# Altium PCB MyFirstPCB.PcbDoc
Units mil, origin at the board's own origin, x right, y up, seen from the top; angles counter-clockwise.
Board outline 6000 x 4000 mil, 2 copper layers (Top Layer, Bottom Layer); 4 components, 3 nets, 8 pads, 0 vias.
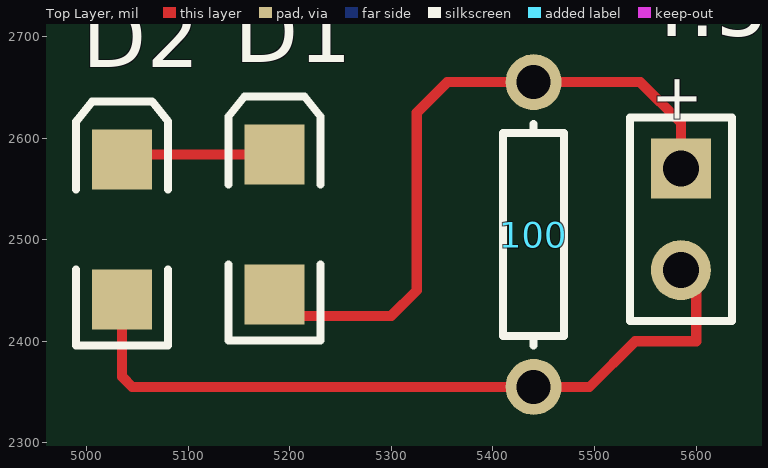
[diagram p0: Top Layer view]
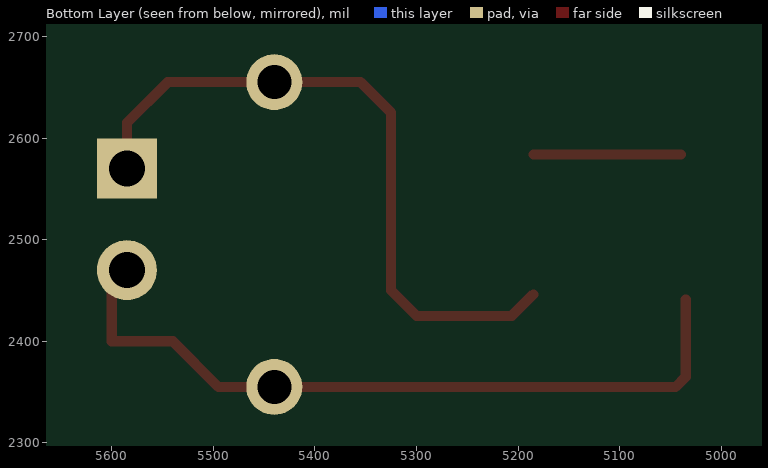
[diagram p1: Bottom Layer view, seen from below]

## Layer stack, top to bottom
Top Solder: solder mask 0.4, Solder Resist, Dk 3.5
Top Layer: signal copper 1.4
Dielectric 1: dielectric 12.6, FR-4, Dk 4.8
Bottom Layer: signal copper 1.4
Bottom Solder: solder mask 0.4, Solder Resist, Dk 3.5

## Board outline
1000,1000 7000,1000 7000,5000 1000,5000

## Design rules (kind name [scope] priority, off if disabled: settings)
Clearance [All] p1: gap=10
PolygonConnect [All] p1: connectstyle=Relief reliefconductorwidth=10 reliefentries=4 polygonreliefangle="90 Angle" airgapwidth=10
RoomDefinition MyFirstSch [InComponentClass('MyFirstSch')] p1: confinementstyle=ConfineIn formatcopy=TRUE lockcomponents=FALSE outline 4860,2263 5642,2263 5642,2737 4860,2737
RoutingVias [All] p1: holewidth=28 width=50 viastyle="Through Hole" minholewidth=28 minwidth=50 maxholewidth=28 maxwidth=50
SolderMaskExpansion [All] p1: expansion=4
Width [All] p1: maxlimit=10 minlimit=10 preferedwidth=10
29 further rules are at their usual default settings.

## Components (designator, comment, footprint, x,y, rotation, side; value= is the part's Value field where it differs from the comment)
4.5V "Battery" BAT-2 5585,2520 r270 top
100 "Res1" AXIAL-0.3 5440,2505 r270 top
D1 "LED1" 3.2X1.6X1.1 5185,2515 r90 top
D2 "LED2" 3.2X1.6X1.1 5035,2510 r90 top

## Footprints (in the part's own frame and the unit in brackets; to place one, negate y for a bottom-side part, rotate by r counter-clockwise, add the part's x,y. Pads: shape width x height; smd on the part's side, far side on the other; paste and mask are expansions set on the pad)
3.2X1.6X1.1 [mm] "SMT LED; 2 Flat Leads"
  rect 1.5x1.5 smd: 1(-1.75,0) 2(1.75,0)
  silkscreen extent -2.9,-1.15 3.2,1.15
AXIAL-0.3 [mm] "Axial Device, Thru-Hole; 2 Leads; 0.3 in Pin Spacing"
  round 1.4 hole 0.85: 1(-3.81,0) 2(3.81,0)
  silkscreen extent -2.77,-0.76 2.77,0.76
BAT-2 [mm] "Battery; 2 Leads"
  rect 1.5x1.5 hole 0.9: 1(-1.27,0)
  round 1.5 hole 0.9: 2(1.27,0)
  silkscreen extent -2.54,-1.27 2.54,1.27

## Part data
4.5V: "Multicell Battery"
100: "Resistor"
D1: library part LED2, "Typical RED, GREEN, YELLOW, AMBER GaAs LED"
D2: "Typical RED, GREEN, YELLOW, AMBER GaAs LED"

## Nets (pads, with @x,y where several pads share a name; then routed paths per layer and width w, separated by ;. In a path a pad name is that pad's centre, name@x,y a point inside that pad or via, vN(x,y) a via of type N, cw(c..) or ccw(c..) an arc to the next point about the centre after c; other vN are vias at no path point)
Net4.5V_1: 4.5V.1 100.1 D1.1 | length 668.1
  Top Layer w10: D1.1 5206.1,2425 5300,2425 5325,2450 5325,2625 5355,2655 100.1 5545,2655 5585,2615 4.5V.1
Net4.5V_2: 4.5V.2 100.2 D2.1 | length 718.9
  Top Layer w10: D2.1 5035,2365 5045,2355 100.2 5495,2355 5540,2400 5600,2400 4.5V.2@5600,2455
NetD1_2: D1.2 D2.2 | length 145
  Top Layer w10: D2.2@5040,2583.9 D1.2

## Text inside footprints (layer, text, board x,y; h text height)
4.5V: Top Overlay "+" at 5562.28,2664.49 h45.28 r270